# Altium PCB usbasp.PcbDoc (part 2 of 3)
Units mm, origin at the board's own origin, x right, y up, seen from the top; angles counter-clockwise.
Board outline 86.49 x 53.59 mm, 2 copper layers (Top Layer, Bottom Layer); 22 components, 22 nets, 89 pads, 22 vias.
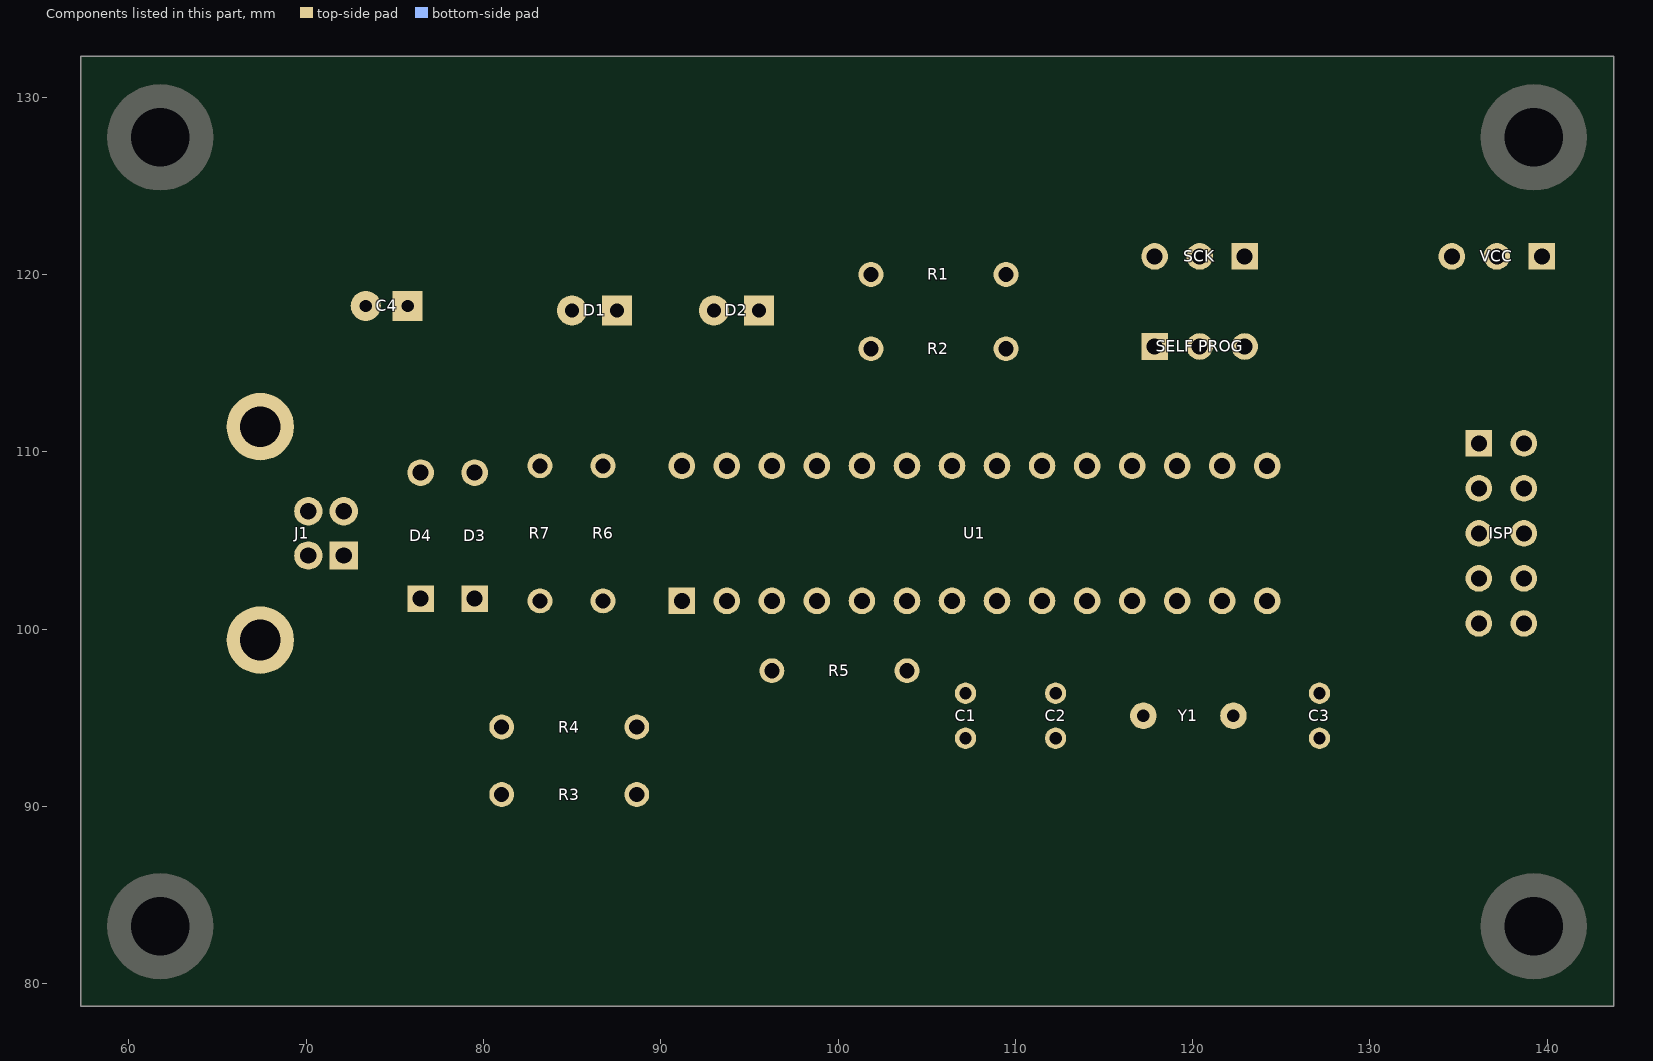
[diagram p2: the components of this part, seen from the top]

## Via types
v1: diameter 1.5, hole 0.711, Top Layer to Bottom Layer, tented top, 17 vias
v2: diameter 1.5, hole 0.711, Top Layer to Bottom Layer, 5 vias

## Nets (pads, with @x,y where several pads share a name; then routed paths per layer and width w, separated by ;. In a path a pad name is that pad's centre, name@x,y a point inside that pad or via, vN(x,y) a via of type N, cw(c..) or ccw(c..) an arc to the next point about the centre after c; other vN are vias at no path point) (continued)
copper on no net: (continued)
  Bottom Layer w0.01: 126.203,122.141 129.468,122.141 ; 126.203,122.193 129.457,122.193 ; 126.203,122.234 129.468,122.234 ; 126.203,122.275 129.457,122.275 ; 126.203,122.306 127.727,122.306 ; 126.203,122.357 127.727,122.357 ; 126.203,122.388 127.727,122.388 ; 126.203,122.429 127.727,122.429 ; 126.203,122.471 127.727,122.471 ; 126.203,122.512 127.727,122.512 ; 126.203,122.553 127.727,122.553 ; 126.203,122.604 127.727,122.604 ; 126.203,122.635 127.727,122.635 ; 126.203,122.687 127.727,122.687 ; 126.203,122.728 127.738,122.728 ; 126.203,122.759 129.457,122.759 ; 126.203,122.8 129.457,122.8 ; 126.203,122.852 129.457,122.852 ; 126.203,122.872 129.457,122.872 ; 126.203,122.924 129.468,122.924 ; 126.203,122.965 129.457,122.965 ; 126.203,123.006 129.457,123.006 ; 126.203,123.058 129.468,123.058 ; 126.203,123.099 129.468,123.099 ; 126.203,123.119 129.457,123.119 ; 126.203,123.181 129.468,123.181 ; 126.203,123.222 129.457,123.222 ; 126.203,123.263 129.468,123.263 ; 126.203,123.294 129.457,123.294 ; 126.203,123.346 129.457,123.346 ; 126.203,123.377 129.457,123.377 ; 126.203,123.428 129.468,123.428 ; 126.203,123.459 129.457,123.459 ; 126.203,123.511 129.457,123.511 ; 126.203,123.542 129.457,123.542 ; 126.203,123.583 129.457,123.583 ; 126.203,123.634 129.457,123.634 ; 126.203,123.665 129.457,123.665 ; 126.203,123.717 129.468,123.717 ; 126.203,123.758 129.457,123.758 ; 126.203,123.789 129.457,123.789 ; 126.203,123.84 129.468,123.84 ; 126.203,123.881 129.457,123.881 ; 126.203,123.912 129.457,123.912 ; 126.203,123.953 129.457,123.953 ; 126.203,124.005 129.457,124.005 ; 126.203,124.036 129.457,124.036 ; 126.203,124.077 129.457,124.077 ; 126.203,124.128 129.457,124.128 ; 126.203,124.159 128.16,124.159 ; 126.203,124.201 128.057,124.201 ; 126.203,124.252 127.985,124.252 ; 126.203,124.293 127.933,124.293 ; 126.203,124.334 127.902,124.334 ; 126.203,124.365 127.882,124.365 ; 126.203,124.417 127.861,124.417 ; 126.203,124.448 127.851,124.448 ; 126.203,124.489 127.83,124.489 ; 126.203,124.54 127.82,124.54 ; 126.203,124.582 127.82,124.582 ; 126.203,124.623 127.81,124.623 ; 126.203,124.654 127.82,124.654 ; 126.203,124.695 127.82,124.695 ; 126.203,124.746 127.82,124.746 ; 126.203,124.777 127.83,124.777 ; 126.203,124.818 127.841,124.818 ; 126.203,124.87 127.861,124.87 ; 126.203,124.901 127.872,124.901 ; 126.203,124.942 127.892,124.942 ; 126.203,124.983 127.923,124.983 ; 126.203,125.035 127.964,125.035 ; 126.203,125.076 128.016,125.076 ; 126.203,125.107 128.057,125.107 ; 126.203,125.148 128.139,125.148 ; 126.203,125.189 129.457,125.189 ; 126.203,125.23 129.457,125.23 ; 126.203,125.272 129.457,125.272 ; 126.203,125.313 129.457,125.313 ; 126.203,125.344 129.468,125.344 ; 126.203,125.395 129.457,125.395 ; 126.203,125.436 129.457,125.436 ; 126.203,125.477 129.457,125.477 ; 126.203,125.529 129.468,125.529 ; 126.203,125.57 129.457,125.57 ; 126.203,125.611 129.457,125.611 ; 126.203,125.653 129.457,125.653 ; 126.203,125.683 129.457,125.683 ; 126.203,125.725 130.106,125.725 ; 126.203,125.766 130.055,125.766 ; 126.203,125.807 130.003,125.807 ; 126.203,125.838 129.962,125.838 ; 126.203,125.9 129.89,125.9 ; 126.203,125.941 129.838,125.941 ; 126.203,125.972 129.807,125.972 ; 126.203,126.013 129.756,126.013 ; 126.203,126.064 129.725,126.064 ; 126.203,126.085 129.694,126.085 ; 126.203,126.137 129.653,126.137 ; 126.203,126.178 129.622,126.178 ; 126.203,126.209 129.602,126.209 ; 126.203,126.26 129.571,126.26 ; 126.203,126.301 129.56,126.301 ; 126.203,126.353 129.54,126.353 ; 126.203,126.384 129.529,126.384 ; 126.203,126.425 129.519,126.425 ; 126.203,126.466 129.519,126.466 ; 126.203,126.497 129.519,126.497 ; 126.203,126.548 129.519,126.548 ; 126.203,126.59 129.519,126.59 ; 126.203,126.631 129.519,126.631 ; 126.203,126.672 129.519,126.672 ; 126.203,126.713 129.529,126.713 ; 126.203,126.744 132.856,126.744 ; 126.214,120.236 129.097,120.236 ; 126.214,120.246 129.148,120.246 ; 126.214,120.257 129.179,120.257 ; 126.214,120.267 129.19,120.267 ; 126.214,120.277 129.21,120.277 ; 126.214,120.287 129.221,120.287 ; 126.214,120.298 129.241,120.298 ; 126.214,120.308 129.251,120.308 ; 126.214,120.318 129.262,120.318 ; 126.214,120.329 129.272,120.329 ; 126.214,120.339 129.293,120.339 ; 126.214,120.349 129.303,120.349 ; 126.214,120.36 129.313,120.36 ; 126.214,120.37 129.323,120.37 ; 126.214,120.38 129.334,120.38 ; 126.214,120.39 129.344,120.39 ; 126.214,120.401 129.354,120.401 ; 126.214,120.411 129.365,120.411 ; 126.214,120.421 129.385,120.421 ; 126.214,120.432 129.396,120.432 ; 126.214,120.442 129.406,120.442 ; 126.214,120.452 129.416,120.452 ; 126.214,120.462 129.426,120.462 ; 126.214,120.473 129.437,120.473 ; 126.214,120.483 129.437,120.483 ; 126.214,120.493 129.447,120.493 ; 126.214,120.504 129.447,120.504 ; 126.214,120.514 129.457,120.514 ; 126.214,120.524 129.457,120.524 ; 126.214,120.535 129.457,120.535 ; 126.214,120.545 129.468,120.545 ; 126.214,120.555 129.457,120.555 ; 126.214,120.565 129.457,120.565 ; 126.214,120.576 129.468,120.576 ; 126.214,120.586 129.457,120.586 ; 126.214,120.596 129.468,120.596 ; 126.214,120.607 129.468,120.607 ; 126.214,120.617 129.457,120.617 ; 126.214,120.627 129.468,120.627 ; 126.214,120.638 129.457,120.638 ; 126.214,120.648 129.457,120.648 ; 126.214,120.658 129.468,120.658 ; 126.214,120.668 129.457,120.668 ; 126.214,120.679 129.468,120.679 ; 126.214,120.689 129.457,120.689 ; 126.214,120.699 129.468,120.699 ; 126.214,120.71 129.457,120.71 ; 126.214,120.72 129.468,120.72 ; 126.214,120.73 129.468,120.73 ; 126.214,120.741 129.457,120.741 ; 126.214,120.751 129.468,120.751 ; 126.214,120.761 129.457,120.761 ; 126.214,120.771 129.468,120.771 ; 126.214,120.782 129.457,120.782 ; 126.214,120.792 129.468,120.792 ; 126.214,120.802 129.457,120.802 ; 126.214,120.813 129.457,120.813 ; 126.214,120.823 129.468,120.823 ; 126.214,120.833 129.468,120.833 ; 126.214,120.844 129.457,120.844 ; 126.214,120.854 129.457,120.854 ; 126.214,120.864 129.468,120.864 ; 126.214,120.874 129.457,120.874 ; 126.214,120.885 129.468,120.885 ; 126.214,120.895 129.457,120.895 ; 126.214,120.905 129.468,120.905 ; 126.214,120.916 129.457,120.916 ; 126.214,120.926 129.468,120.926 ; 126.214,120.936 129.457,120.936 ; 126.214,120.946 129.468,120.946 ; 126.214,120.957 129.457,120.957 ; 126.214,120.967 129.457,120.967 ; 126.214,120.977 129.468,120.977 ; 126.214,120.988 129.457,120.988 ; 126.214,120.998 129.468,120.998 ; 126.214,121.008 129.457,121.008 ; 126.214,121.019 129.468,121.019 ; 126.214,121.029 129.457,121.029 ; 126.214,121.039 129.468,121.039 ; 126.214,121.049 129.457,121.049 ; 126.214,121.06 129.468,121.06 ; 126.214,121.07 129.457,121.07 ; 126.214,121.08 129.468,121.08 ; 126.214,121.091 129.457,121.091 ; 126.214,121.101 129.457,121.101 ; 126.214,121.111 129.468,121.111 ; 126.214,121.122 129.457,121.122 ; 126.214,121.132 129.468,121.132 ; 126.214,121.142 129.468,121.142 ; 126.214,121.152 129.457,121.152 ; 126.214,121.163 129.468,121.163 ; 126.214,121.173 129.468,121.173 ; 126.214,121.183 129.468,121.183 ; 126.214,121.194 129.457,121.194 ; 126.214,121.204 129.468,121.204 ; 126.214,121.214 129.468,121.214 ; 126.214,121.225 129.457,121.225 ; 126.214,121.235 129.468,121.235 ; 126.214,121.245 129.468,121.245 ; 126.214,121.255 129.468,121.255 ; 126.214,121.266 129.457,121.266 ; 126.214,121.276 129.468,121.276 ; 126.214,121.286 129.468,121.286 ; 126.214,121.297 129.457,121.297 ; 126.214,121.307 129.468,121.307 ; 126.214,121.317 129.468,121.317 ; 126.214,121.327 129.468,121.327 ; 126.214,121.338 129.468,121.338 ; 126.214,121.348 129.468,121.348 ; 126.214,121.358 129.468,121.358 ; 126.214,121.369 129.468,121.369 ; 126.214,121.379 129.468,121.379 ; 126.214,121.389 129.468,121.389 ; 126.214,121.4 129.468,121.4 ; 126.214,121.41 129.468,121.41 ; 126.214,121.42 129.468,121.42 ; 126.214,121.43 129.468,121.43 ; 126.214,121.441 129.468,121.441 ; 126.214,121.451 129.468,121.451 ; 126.214,121.461 129.468,121.461 ; 126.214,121.472 129.468,121.472 ; 126.214,121.482 129.468,121.482 ; 126.214,121.492 129.468,121.492 ; 126.214,121.503 129.468,121.503 ; 126.214,121.513 129.478,121.513 ; 126.214,121.523 129.468,121.523 ; 126.214,121.533 129.468,121.533 ; 126.214,121.544 129.468,121.544 ; 126.214,121.554 129.478,121.554 ; 126.214,121.564 129.468,121.564 ; 126.214,121.575 129.468,121.575 ; 126.214,121.585 129.468,121.585 ; 126.214,121.595 129.468,121.595 ; 126.214,121.606 129.468,121.606 ; 126.214,121.616 129.468,121.616 ; 126.214,121.626 129.468,121.626 ; 126.214,121.636 129.468,121.636 ; 126.214,121.647 129.478,121.647 ; 126.214,121.657 129.468,121.657 ; 126.214,121.667 129.468,121.667 ; 126.214,121.678 129.468,121.678 ; 126.214,121.688 129.468,121.688 ; 126.214,121.698 129.478,121.698 ; 126.214,121.709 129.468,121.709 ; 126.214,121.719 129.478,121.719 ; 126.214,121.729 129.468,121.729 ; 126.214,121.739 129.478,121.739 ; 126.214,121.75 129.468,121.75 ; 126.214,121.76 129.468,121.76 ; 126.214,121.77 129.468,121.77 ; 126.214,121.781 129.478,121.781 ; 126.214,121.791 129.468,121.791 ; 126.214,121.801 129.478,121.801 ; 126.214,121.811 129.468,121.811 ; 126.214,121.822 129.478,121.822 ; 126.214,121.832 129.468,121.832 ; 126.214,121.842 129.468,121.842 ; 126.214,121.853 129.478,121.853 ; 126.214,121.863 129.468,121.863 ; 126.214,121.873 129.478,121.873 ; 126.214,121.884 129.468,121.884 ; 126.214,121.894 129.478,121.894 ; 126.214,121.904 129.468,121.904 ; 126.214,121.914 129.468,121.914 ; 126.214,121.925 129.478,121.925 ; 126.214,121.935 129.468,121.935 ; 126.214,121.945 129.478,121.945 ; 126.214,121.956 129.468,121.956 ; 126.214,121.966 129.468,121.966 ; 126.214,121.976 129.478,121.976 ; 126.214,121.987 129.468,121.987 ; 126.214,121.997 129.468,121.997 ; 126.214,122.007 129.468,122.007 ; 126.214,122.017 129.468,122.017 ; 126.214,122.028 129.468,122.028 ; 126.214,122.038 129.468,122.038 ; 126.214,122.048 129.468,122.048 ; 126.214,122.059 129.468,122.059 ; 126.214,122.069 129.468,122.069 ; 126.214,122.079 129.468,122.079 ; 126.214,122.09 129.468,122.09 ; 126.214,122.1 129.468,122.1 ; 126.214,122.11 129.468,122.11 ; 126.214,122.12 129.468,122.12 ; 126.214,122.131 129.468,122.131 ; 126.214,122.151 129.468,122.151 ; 126.214,122.162 129.468,122.162 ; 126.214,122.172 129.468,122.172 ; 126.214,122.182 129.468,122.182 ; 126.214,122.203 129.468,122.203 ; 126.214,122.213 129.457,122.213 ; 126.214,122.223 129.468,122.223 ; 126.214,122.244 129.457,122.244 ; 126.214,122.254 129.457,122.254 ; 126.214,122.265 129.468,122.265 ; 126.214,122.285 127.727,122.285 ; 126.214,122.295 127.727,122.295 ; 126.214,122.316 127.727,122.316 ; 126.214,122.326 127.727,122.326 ; 126.214,122.337 127.727,122.337 ; 126.214,122.347 127.727,122.347 ; 126.214,122.368 127.727,122.368 ; 126.214,122.378 127.727,122.378 ; 126.214,122.398 127.727,122.398 ; 126.214,122.409 127.727,122.409 ; 126.214,122.419 127.727,122.419 ; 126.214,122.44 127.727,122.44 ; 126.214,122.45 127.727,122.45 ; 126.214,122.46 127.727,122.46 ; 126.214,122.481 127.727,122.481 ; 126.214,122.491 127.727,122.491 ; 126.214,122.501 127.727,122.501 ; 126.214,122.522 127.727,122.522 ; 126.214,122.532 127.727,122.532 ; 126.214,122.543 127.727,122.543 ; 126.214,122.563 127.727,122.563 ; 126.214,122.574 127.727,122.574 ; 126.214,122.584 127.727,122.584 ; 126.214,122.594 127.727,122.594 ; 126.214,122.615 127.727,122.615 ; 126.214,122.625 127.727,122.625 ; 126.214,122.646 127.727,122.646 ; 126.214,122.656 127.727,122.656 ; 126.214,122.666 127.727,122.666 ; 126.214,122.676 127.727,122.676 ; 126.214,122.697 127.727,122.697 ; 126.214,122.707 127.727,122.707 ; 126.214,122.718 127.727,122.718 ; 126.214,122.738 129.468,122.738 ; 126.214,122.749 129.457,122.749 ; 126.214,122.769 129.468,122.769 ; 126.214,122.779 129.457,122.779 ; 126.214,122.79 129.457,122.79 ; 126.214,122.81 129.468,122.81 ; 126.214,122.821 129.457,122.821 ; 126.214,122.831 129.468,122.831 ; 126.214,122.841 129.457,122.841 ; 126.214,122.862 129.468,122.862 ; 126.214,122.882 129.457,122.882 ; 126.214,122.893 129.468,122.893 ; 126.214,122.903 129.457,122.903 ; 126.214,122.913 129.457,122.913 ; 126.214,122.934 129.457,122.934 ; 126.214,122.944 129.457,122.944 ; 126.214,122.955 129.468,122.955 ; 126.214,122.975 129.457,122.975 ; 126.214,122.985 129.468,122.985 ; 126.214,122.996 129.468,122.996 ; 126.214,123.016 129.457,123.016 ; 126.214,123.027 129.468,123.027 ; 126.214,123.037 129.457,123.037 ; 126.214,123.047 129.457,123.047 ; 126.214,123.068 129.457,123.068 ; 126.214,123.078 129.457,123.078 ; 126.214,123.088 129.457,123.088 ; 126.214,123.109 129.457,123.109 ; 126.214,123.13 129.457,123.13 ; 126.214,123.14 129.468,123.14 ; 126.214,123.15 129.457,123.15 ; 126.214,123.16 129.457,123.16 ; 126.214,123.171 129.457,123.171 ; 126.214,123.191 129.457,123.191 ; 126.214,123.202 129.468,123.202 ; 126.214,123.212 129.457,123.212 ; 126.214,123.233 129.468,123.233 ; 126.214,123.243 129.457,123.243 ; 126.214,123.253 129.457,123.253 ; 126.214,123.274 129.457,123.274 ; 126.214,123.284 129.457,123.284 ; 126.214,123.305 129.468,123.305 ; 126.214,123.315 129.457,123.315 ; 126.214,123.325 129.468,123.325 ; 126.214,123.336 129.457,123.336 ; 126.214,123.356 129.468,123.356 ; 126.214,123.366 129.457,123.366 ; 126.214,123.387 129.468,123.387 ; 126.214,123.397 129.457,123.397 ; 126.214,123.408 129.457,123.408 ; 126.214,123.418 129.457,123.418 ; 126.214,123.439 129.457,123.439 ; 126.214,123.449 129.457,123.449 ; 126.214,123.469 129.468,123.469 ; 126.214,123.48 129.457,123.48 ; 126.214,123.49 129.468,123.49 ; 126.214,123.5 129.457,123.5 ; 126.214,123.521 129.468,123.521 ; 126.214,123.531 129.468,123.531 ; 126.214,123.552 129.457,123.552 ; 126.214,123.562 129.468,123.562 ; 126.214,123.572 129.457,123.572 ; 126.214,123.593 129.468,123.593 ; 126.214,123.603 129.457,123.603 ; 126.214,123.614 129.468,123.614 ; 126.214,123.624 129.457,123.624 ; 126.214,123.644 129.468,123.644 ; 126.214,123.655 129.457,123.655 ; 126.214,123.675 129.468,123.675 ; 126.214,123.686 129.457,123.686 ; 126.214,123.696 129.457,123.696 ; 126.214,123.706 129.457,123.706 ; 126.214,123.727 129.457,123.727 ; 126.214,123.737 129.468,123.737 ; 126.214,123.747 129.457,123.747 ; 126.214,123.768 129.468,123.768 ; 126.214,123.778 129.457,123.778 ; 126.214,123.799 129.468,123.799 ; 126.214,123.809 129.457,123.809 ; 126.214,123.82 129.457,123.82 ; 126.214,123.83 129.457,123.83 ; 126.214,123.85 129.457,123.85 ; 126.214,123.861 129.468,123.861 ; 126.214,123.871 129.457,123.871 ; 126.214,123.892 129.468,123.892 ; 126.214,123.902 129.457,123.902 ; 126.214,123.923 129.468,123.923 ; 126.214,123.933 129.457,123.933 ; 126.214,123.943 129.468,123.943 ; 126.214,123.964 129.457,123.964 ; 126.214,123.974 129.468,123.974 ; 126.214,123.984 129.468,123.984 ; 126.214,123.995 129.457,123.995 ; 126.214,124.015 129.457,124.015 ; 126.214,124.025 129.468,124.025 ; 126.214,124.046 129.468,124.046 ; 126.214,124.056 129.457,124.056 ; 126.214,124.067 129.457,124.067 ; 126.214,124.087 129.468,124.087 ; 126.214,124.098 129.457,124.098 ; 126.214,124.108 129.457,124.108 ; 126.214,124.118 129.468,124.118 ; 126.214,124.139 128.263,124.139 ; 126.214,124.149 128.201,124.149 ; 126.214,124.17 128.129,124.17 ; 126.214,124.18 128.098,124.18 ; 126.214,124.19 128.077,124.19 ; 126.214,124.211 128.036,124.211 ; 126.214,124.221 128.026,124.221 ; 126.214,124.231 128.005,124.231 ; 126.214,124.242 127.995,124.242 ; 126.214,124.262 127.964,124.262 ; 126.214,124.273 127.964,124.273 ; 126.214,124.283 127.944,124.283 ; 126.214,124.304 127.933,124.304 ; 126.214,124.314 127.923,124.314 ; 126.214,124.324 127.913,124.324 ; 126.214,124.345 127.902,124.345 ; 126.214,124.355 127.892,124.355 ; 126.214,124.376 127.882,124.376 ; 126.214,124.386 127.872,124.386 ; 126.214,124.396 127.872,124.396 ; 126.214,124.407 127.861,124.407 ; 126.214,124.427 127.851,124.427 ; 126.214,124.437 127.851,124.437 ; 126.214,124.458 127.841,124.458 ; 126.214,124.468 127.841,124.468 ; 126.214,124.479 127.841,124.479 ; 126.214,124.499 127.83,124.499 ; 126.214,124.509 127.83,124.509 ; 126.214,124.52 127.83,124.52 ; 126.214,124.53 127.82,124.53 ; 126.214,124.551 127.82,124.551 ; 126.214,124.561 127.82,124.561 ; 126.214,124.571 127.82,124.571 ; 126.214,124.592 127.82,124.592 ; 126.214,124.602 127.81,124.602 ; 126.214,124.612 127.82,124.612 ; 126.214,124.633 127.82,124.633 ; 126.214,124.643 127.82,124.643 ; 126.214,124.664 127.81,124.664 ; 126.214,124.674 127.82,124.674 ; 126.214,124.685 127.82,124.685 ; 126.214,124.705 127.82,124.705 ; 126.214,124.715 127.82,124.715 ; 126.214,124.726 127.82,124.726 ; 126.214,124.736 127.82,124.736 ; 126.214,124.757 127.83,124.757 ; 126.214,124.767 127.83,124.767 ; 126.214,124.788 127.83,124.788 ; 126.214,124.798 127.841,124.798 ; 126.214,124.808 127.841,124.808 ; 126.214,124.829 127.851,124.829 ; 126.214,124.839 127.851,124.839 ; 126.214,124.849 127.851,124.849 ; 126.214,124.86 127.851,124.86 ; 126.214,124.88 127.872,124.88 ; 126.214,124.89 127.872,124.89 ; 126.214,124.911 127.882,124.911 ; 126.214,124.921 127.882,124.921 ; 126.214,124.932 127.892,124.932 ; 126.214,124.952 127.902,124.952 ; 126.214,124.963 127.913,124.963 ; 126.214,124.973 127.913,124.973 ; 126.214,124.993 127.933,124.993 ; 126.214,125.004 127.944,125.004 ; 126.214,125.014 127.954,125.014 ; 126.214,125.024 127.954,125.024 ; 126.214,125.045 127.974,125.045 ; 126.214,125.055 127.985,125.055 ; 126.214,125.066 127.995,125.066 ; 126.214,125.086 128.026,125.086 ; 126.214,125.096 128.036,125.096 ; 126.214,125.117 128.077,125.117 ; 126.214,125.127 128.088,125.127 ; 126.214,125.138 128.108,125.138 ; 126.214,125.158 128.16,125.158 ; 126.214,125.169 128.211,125.169 ; 126.214,125.179 129.457,125.179 ; 126.214,125.199 129.468,125.199 ; 126.214,125.21 129.457,125.21 ; 126.214,125.22 129.468,125.22 ; 126.214,125.241 129.457,125.241 ; 126.214,125.251 129.468,125.251 ; 126.214,125.261 129.457,125.261 ; 126.214,125.282 129.468,125.282 ; 126.214,125.292 129.457,125.292 ; 126.214,125.302 129.457,125.302 ; 126.214,125.323 129.468,125.323 ; 126.214,125.333 129.457,125.333 ; 126.214,125.354 129.457,125.354 ; 126.214,125.364 129.457,125.364 ; 126.214,125.374 129.468,125.374 ; 126.214,125.385 129.457,125.385 ; 126.214,125.405 129.468,125.405 ; 126.214,125.416 129.457,125.416 ; 126.214,125.426 129.457,125.426 ; 126.214,125.447 129.468,125.447 ; 126.214,125.457 129.457,125.457 ; 126.214,125.467 129.457,125.467 ; 126.214,125.488 129.468,125.488 ; 126.214,125.498 129.457,125.498 ; 126.214,125.508 129.457,125.508 ; 126.214,125.519 129.457,125.519 ; 126.214,125.539 129.457,125.539 ; 126.214,125.55 129.468,125.55 ; 126.214,125.56 129.457,125.56 ; 126.214,125.58 129.468,125.58 ; 126.214,125.591 129.457,125.591 ; 126.214,125.601 129.468,125.601 ; 126.214,125.622 129.457,125.622 ; 126.214,125.632 129.457,125.632 ; 126.214,125.642 129.468,125.642 ; 126.214,125.663 129.457,125.663 ; 126.214,125.673 129.468,125.673 ; 126.214,125.694 129.457,125.694 ; 126.214,125.704 129.468,125.704 ; 126.214,125.714 130.116,125.714 ; 126.214,125.735 130.086,125.735 ; 126.214,125.745 130.075,125.745 ; 126.214,125.756 130.055,125.756 ; 126.214,125.776 130.034,125.776 ; 126.214,125.786 130.024,125.786 ; 126.214,125.797 130.003,125.797 ; 126.214,125.817 129.983,125.817 ; 126.214,125.828 129.972,125.828 ; 126.214,125.848 129.952,125.848 ; 126.214,125.858 129.941,125.858 ; 126.214,125.869 129.921,125.869 ; 126.214,125.879 129.91,125.879 ; 126.214,125.889 129.9,125.889 ; 126.214,125.91 129.88,125.91 ; 126.214,125.92 129.859,125.92 ; 126.214,125.931 129.859,125.931 ; 126.214,125.951 129.828,125.951 ; 126.214,125.961 129.818,125.961 ; 126.214,125.982 129.787,125.982 ; 126.214,125.992 129.787,125.992 ; 126.214,126.003 129.766,126.003 ; 126.214,126.023 129.756,126.023 ; 126.214,126.034 129.735,126.034 ; 126.214,126.044 129.735,126.044 ; 126.214,126.054 129.725,126.054 ; 126.214,126.075 129.705,126.075 ; 126.214,126.095 129.694,126.095 ; 126.214,126.106 129.684,126.106 ; 126.214,126.116 129.674,126.116 ; 126.214,126.126 129.663,126.126 ; 126.214,126.147 129.653,126.147 ; 126.214,126.157 129.643,126.157 ; 126.214,126.167 129.643,126.167 ; 126.214,126.188 129.622,126.188 ; 126.214,126.198 129.612,126.198 ; 126.214,126.219 129.602,126.219 ; 126.214,126.229 129.591,126.229 ; 126.214,126.239 129.581,126.239 ; 126.214,126.25 129.581,126.25 ; 126.214,126.27 129.571,126.27 ; 126.214,126.281 129.56,126.281 ; 126.214,126.291 129.56,126.291 ; 126.214,126.312 129.55,126.312 ; 126.214,126.322 129.55,126.322 ; 126.214,126.332 129.54,126.332 ; 126.214,126.342 129.54,126.342 ; 126.214,126.363 129.54,126.363 ; 126.214,126.373 129.54,126.373 ; 126.214,126.394 129.529,126.394 ; 126.214,126.404 129.529,126.404 ; 126.214,126.415 129.529,126.415 ; 126.214,126.435 129.529,126.435 ; 126.214,126.445 129.519,126.445 ; 126.214,126.456 129.529,126.456 ; 126.214,126.476 129.519,126.476 ; 126.214,126.487 129.519,126.487 ; 126.214,126.507 129.519,126.507 ; 126.214,126.518 129.519,126.518 ; 126.214,126.528 129.519,126.528 ; 126.214,126.538 129.509,126.538 ; 126.214,126.559 129.519,126.559 ; 126.214,126.569 129.519,126.569 ; 126.214,126.579 129.519,126.579 ; 126.214,126.6 129.519,126.6 ; 126.214,126.61 129.519,126.61 ; 126.214,126.621 129.519,126.621 ; 126.214,126.641 129.519,126.641 ; 126.214,126.651 129.519,126.651 ; 126.214,126.662 129.519,126.662 ; 126.214,126.682 129.519,126.682 ; 126.214,126.693 129.519,126.693 ; 126.214,126.703 129.519,126.703 ; 126.214,126.723 129.519,126.723 ; 126.214,126.734 129.519,126.734 ; 126.214,126.754 132.856,126.754 ; 126.214,126.765 132.856,126.765 ; 126.214,126.775 132.845,126.775 ; 126.214,126.785 132.856,126.785 ; 126.214,126.796 132.856,126.796 ; 126.214,126.806 126.265,126.806 ; 126.275,126.806 127.985,126.806 ; 126.306,120.226 126.317,120.226 ; 126.347,120.226 126.358,120.226 ; 126.378,120.226 126.389,120.226 ; 126.399,120.226 126.409,120.226 ; 126.42,120.226 126.43,120.226 ; 126.44,120.226 126.45,120.226 ; 126.461,120.226 126.471,120.226 ; 126.481,120.226 126.492,120.226 ; 126.502,120.226 126.512,120.226 ; 126.523,120.226 126.739,120.226 ; 126.636,126.816 126.646,126.816 ; 126.749,120.226 128.479,120.226 ; 126.79,126.816 126.801,126.816 ; 126.862,126.816 126.873,126.816 ; 127.748,122.728 127.758,122.728 ; 127.769,122.728 127.779,122.728 ; 127.789,122.728 127.799,122.728 ; 127.81,122.728 127.82,122.728 ; 127.83,122.728 127.841,122.728 ; 127.851,122.728 127.861,122.728 ; 127.872,122.728 127.882,122.728 ; 127.892,122.728 127.902,122.728 ; 127.913,122.728 127.923,122.728 ; 127.933,122.728 127.944,122.728 ; 127.954,122.728 127.964,122.728 ; 127.974,122.728 127.985,122.728 ; 127.995,122.728 128.005,122.728 ; 127.995,126.806 128.098,126.806 ; 128.016,122.728 128.026,122.728 ; 128.036,122.728 128.047,122.728 ; 128.057,122.728 128.067,122.728 ; 128.077,122.728 128.088,122.728 ; 128.098,122.728 128.108,122.728 ; 128.108,126.806 128.18,126.806 ; 128.119,122.728 128.129,122.728 ; 128.139,122.728 128.15,122.728 ; 128.16,122.728 128.17,122.728 ; 128.17,125.158 128.18,125.158 ; 128.18,122.728 128.191,122.728 ; 128.191,126.806 128.273,126.806 ; 128.201,122.728 128.211,122.728 ; 128.222,122.728 128.232,122.728 ; 128.222,125.169 128.232,125.169 ; 128.242,122.728 128.253,122.728 ; 128.263,122.728 128.273,122.728 ; 128.283,122.728 128.294,122.728 ; 128.283,124.139 128.294,124.139 ; 128.283,126.806 128.314,126.806 ; 128.304,122.728 128.314,122.728 ; 128.325,122.728 128.335,122.728 ; 128.325,126.806 128.345,126.806 ; 128.345,122.728 128.355,122.728 ; 128.345,125.169 129.468,125.169 ; 128.355,126.806 128.366,126.806 ; 128.366,122.728 128.376,122.728 ; 128.376,124.139 128.386,124.139 ; 128.376,126.806 128.386,126.806 ; 128.386,122.728 128.397,122.728 ; 128.397,124.139 129.468,124.139 ; 128.397,126.806 128.407,126.806 ; 128.407,122.728 128.417,122.728 ; 128.417,125.158 129.457,125.158 ; 128.428,122.728 128.438,122.728 ; 128.448,122.728 128.458,122.728 ; 128.448,124.149 129.457,124.149 ; 128.448,125.148 129.457,125.148 ; 128.469,122.728 128.479,122.728 ; 128.469,126.806 128.479,126.806 ; 128.489,120.226 128.613,120.226 ; 128.489,122.728 128.5,122.728 ; 128.489,124.159 129.457,124.159 ; 128.489,125.138 129.468,125.138 ; 128.51,122.728 128.52,122.728 ; 128.52,124.17 129.457,124.17 ; 128.52,125.127 129.457,125.127 ; 128.531,122.728 128.541,122.728 ; 128.541,124.18 129.468,124.18 ; 128.541,125.117 129.457,125.117 ; 128.551,122.728 128.561,122.728 ; 128.561,124.19 129.457,124.19 ; 128.561,125.107 129.468,125.107 ; 128.572,122.728 128.582,122.728 ; 128.582,124.201 129.457,124.201 ; 128.582,125.096 129.457,125.096 ; 128.592,122.728 128.603,122.728 ; 128.603,124.211 129.468,124.211 ; 128.603,125.086 129.457,125.086 ; 128.613,122.728 128.623,122.728 ; 128.613,124.221 129.457,124.221 ; 128.623,120.226 128.644,120.226 ; 128.623,125.076 129.468,125.076 ; 128.634,122.728 128.644,122.728 ; 128.634,124.231 129.457,124.231 ; 128.634,125.066 129.457,125.066 ; 128.644,124.242 129.457,124.242 ; 128.654,120.226 128.664,120.226 ; 128.654,122.728 128.664,122.728 ; 128.654,124.252 129.468,124.252 ; 128.654,125.055 129.468,125.055 ; 128.664,124.262 129.457,124.262 ; 128.664,125.045 129.457,125.045 ; 128.664,126.806 128.675,126.806 ; 128.675,120.226 128.685,120.226 ; 128.675,122.728 128.685,122.728 ; 128.675,124.273 129.457,124.273 ; 128.675,125.035 129.457,125.035 ; 128.685,124.283 129.457,124.283 ; 128.685,125.024 129.468,125.024 ; 128.685,126.806 130.353,126.806 ; 128.695,120.226 128.706,120.226 ; 128.695,122.728 128.706,122.728 ; 128.695,124.293 129.468,124.293 ; 128.695,125.014 129.457,125.014 ; 128.706,124.304 129.457,124.304 ; 128.706,125.004 129.457,125.004 ; 128.716,120.226 128.726,120.226 ; 128.716,122.728 128.726,122.728 ; 128.716,124.314 129.468,124.314 ; 128.716,124.993 129.457,124.993 ; 128.726,124.324 129.457,124.324 ; 128.726,124.334 129.468,124.334 ; 128.726,124.983 129.468,124.983 ; 128.737,120.226 128.747,120.226 ; 128.737,122.728 128.747,122.728 ; 128.737,124.345 129.457,124.345 ; 128.737,124.973 129.457,124.973 ; 128.747,124.355 129.457,124.355 ; 128.747,124.952 129.457,124.952 ; 128.747,124.963 129.468,124.963 ; 128.747,126.816 128.757,126.816 ; 128.757,120.226 128.767,120.226 ; 128.757,122.728 128.767,122.728 ; 128.757,124.365 129.468,124.365 ; 128.757,124.376 129.457,124.376 ; 128.757,124.942 129.457,124.942 ; 128.767,124.386 129.457,124.386 ; 128.767,124.396 129.468,124.396 ; 128.767,124.921 129.457,124.921 ; 128.767,124.932 129.468,124.932 ; 128.767,126.816 130.281,126.816 ; 128.778,120.226 128.788,120.226 ; 128.778,122.728 128.788,122.728 ; 128.778,124.407 129.457,124.407 ; 128.778,124.901 129.457,124.901 ; 128.778,124.911 129.468,124.911 ; 128.788,124.417 129.468,124.417 ; 128.788,124.427 129.457,124.427 ; 128.788,124.437 129.468,124.437 ; 128.788,124.89 129.457,124.89 ; 128.798,120.226 128.809,120.226 ; 128.798,122.728 128.809,122.728 ; 128.798,124.448 129.457,124.448 ; 128.798,124.458 129.457,124.458 ; 128.798,124.86 129.468,124.86 ; 128.798,124.87 129.457,124.87 ; 128.798,124.88 129.457,124.88 ; 128.809,124.468 129.468,124.468 ; 128.809,124.479 129.457,124.479 ; 128.809,124.489 129.457,124.489 ; 128.809,124.839 129.457,124.839 ; 128.809,124.849 129.457,124.849 ; 128.809,126.826 130.219,126.826 ; 128.819,120.226 128.829,120.226 ; 128.819,122.728 128.829,122.728 ; 128.819,124.499 129.457,124.499 ; 128.819,124.509 129.468,124.509 ; 128.819,124.52 129.457,124.52 ; 128.819,124.53 129.468,124.53 ; 128.819,124.798 129.468,124.798 ; 128.819,124.808 129.457,124.808 ; 128.819,124.818 129.457,124.818 ; 128.819,124.829 129.468,124.829 ; 128.829,124.54 129.457,124.54 ; 128.829,124.551 129.457,124.551 ; 128.829,124.561 129.457,124.561 ; 128.829,124.582 129.457,124.582 ; 128.829,124.736 129.457,124.736 ; 128.829,124.757 129.457,124.757 ; 128.829,124.767 129.468,124.767 ; 128.829,124.777 129.457,124.777 ; 128.829,124.788 129.457,124.788 ; 128.839,122.728 128.85,122.728 ; 128.839,124.571 129.468,124.571 ; 128.839,124.592 129.468,124.592 ; 128.839,124.602 129.457,124.602 ; 128.839,124.612 129.457,124.612 ; 128.839,124.623 129.457,124.623 ; 128.839,124.633 129.468,124.633 ; 128.839,124.643 129.457,124.643 ; 128.839,124.654 129.468,124.654 ; 128.839,124.664 129.457,124.664 ; 128.839,124.674 129.457,124.674 ; 128.839,124.685 129.468,124.685 ; 128.839,124.695 129.457,124.695 ; 128.839,124.705 129.457,124.705 ; 128.839,124.715 129.468,124.715 ; 128.839,124.726 129.457,124.726 ; 128.839,124.746 129.468,124.746 ; 128.86,122.728 128.87,122.728 ; 128.86,126.837 130.188,126.837 ; 128.881,122.728 128.891,122.728 ; 128.891,126.847 130.137,126.847 ; 128.901,122.728 128.912,122.728 ; 128.922,122.728 128.932,122.728 ; 128.922,126.857 130.116,126.857 ; 128.942,122.728 128.953,122.728 ; 128.953,126.868 130.086,126.868 ; 128.973,122.728 128.984,122.728 ; 128.973,126.878 130.065,126.878 ; 128.994,122.728 129.004,122.728 ; 128.994,126.888 130.044,126.888 ; 129.015,122.728 129.025,122.728 ; 129.025,126.899 130.013,126.899 ; 129.035,126.909 130.003,126.909 ; 129.045,122.728 129.056,122.728 ; 129.056,126.919 129.983,126.919 ; 129.076,122.728 129.087,122.728 ; 129.076,126.929 129.962,126.929 ; 129.097,122.728 129.107,122.728 ; 129.097,126.94 129.941,126.94 ; 129.107,126.95 129.931,126.95 ; 129.118,122.728 129.128,122.728 ; 129.128,126.96 129.91,126.96 ; 129.138,122.728 129.148,122.728 ; 129.138,126.971 129.9,126.971 ; 129.159,122.728 129.169,122.728 ; 129.159,126.981 129.88,126.981 ; 129.169,126.991 129.869,126.991 ; 129.179,122.728 129.19,122.728 ; 129.179,127.002 129.859,127.002 ; 129.2,122.728 129.21,122.728 ; 129.2,127.012 129.838,127.012 ; 129.21,127.022 129.828,127.022 ; 129.221,122.728 129.231,122.728 ; 129.221,127.032 129.818,127.032 ; 129.231,127.043 129.807,127.043 ; 129.241,122.728 129.251,122.728 ; 129.241,127.053 129.787,127.053 ; 129.251,127.063 129.787,127.063 ; 129.262,122.728 129.272,122.728 ; 129.262,127.074 129.777,127.074 ; 129.272,127.084 129.766,127.084 ; 129.282,122.728 129.293,122.728 ; 129.282,127.094 129.756,127.094 ; 129.293,127.104 129.746,127.104 ; 129.303,122.728 129.313,122.728 ; 129.303,127.115 129.735,127.115 ; 129.313,127.125 129.725,127.125 ; 129.313,127.135 129.725,127.135 ; 129.323,127.146 129.715,127.146 ; 129.334,122.728 129.344,122.728 ; 129.334,127.156 129.705,127.156 ; 129.334,127.166 129.694,127.166 ; 129.344,127.177 129.694,127.177 ; 129.354,122.728 129.365,122.728 ; 129.354,127.187 129.684,127.187 ; 129.354,127.197 129.684,127.197 ; 129.365,127.207 129.674,127.207 ; 129.365,127.218 129.663,127.218 ; 129.375,122.728 129.385,122.728 ; 129.375,127.228 129.663,127.228 ; 129.385,127.238 129.653,127.238 ; 129.385,127.249 129.653,127.249 ; 129.385,127.259 129.643,127.259 ; 129.396,122.728 129.406,122.728 ; 129.396,127.269 129.643,127.269 ; 129.406,127.28 129.632,127.28 ; 129.406,127.29 129.622,127.29 ; 129.416,127.3 129.622,127.3 ; 129.416,127.31 129.612,127.31 ; 129.426,122.728 129.437,122.728 ; 129.426,127.321 129.612,127.321 ; 129.426,127.331 129.602,127.331 ; 129.437,127.341 129.602,127.341 ; 129.437,127.352 129.591,127.352 ; 129.447,122.728 129.457,122.728 ; 129.447,127.362 129.581,127.362 ; 129.457,127.372 129.581,127.372 ; 129.457,127.383 129.571,127.383 ; 129.457,127.393 129.571,127.393 ; 129.468,127.403 129.56,127.403 ; 129.478,125.704 130.127,125.704 ; 129.478,127.413 129.56,127.413 ; 129.478,127.424 129.55,127.424 ; 129.488,125.683 130.168,125.683 ; 129.488,125.694 130.147,125.694 ; 129.488,127.434 129.54,127.434 ; 129.488,127.444 129.54,127.444 ; 129.499,127.455 129.529,127.455 ; 129.499,127.465 129.529,127.465 ; 129.509,120.802 130.003,120.802 ; 129.509,125.663 130.199,125.663 ; 129.509,125.673 130.178,125.673 ; 129.509,127.475 129.519,127.475 ; 129.519,120.668 132.856,120.668 ; 129.519,120.689 132.856,120.689 ; 129.519,120.699 132.856,120.699 ; 129.519,120.71 130.456,120.71 ; 129.519,120.72 130.302,120.72 ; 129.519,120.73 130.23,120.73 ; 129.519,120.741 130.178,120.741 ; 129.519,120.751 130.137,120.751 ; 129.519,120.761 130.096,120.761 ; 129.519,120.771 130.065,120.771 ; 129.519,120.782 130.044,120.782 ; 129.519,120.792 130.024,120.792 ; 129.519,120.813 129.983,120.813 ; 129.519,120.823 129.962,120.823 ; 129.519,120.833 129.952,120.833 ; 129.519,120.844 129.931,120.844 ; 129.519,120.854 129.921,120.854 ; 129.519,120.864 129.91,120.864 ; 129.519,120.874 129.89,120.874 ; 129.519,120.885 129.89,120.885 ; 129.519,120.895 129.88,120.895 ; 129.519,120.905 129.869,120.905 ; 129.519,120.916 129.859,120.916 ; 129.519,120.926 129.849,120.926 ; 129.519,120.936 129.849,120.936 ; 129.519,120.946 129.838,120.946 ; 129.519,120.957 129.828,120.957 ; 129.519,120.967 129.818,120.967 ; 129.519,120.977 129.818,120.977 ; 129.519,120.998 129.807,120.998 ; 129.519,121.008 129.797,121.008 ; 129.519,121.019 129.797,121.019 ; 129.519,121.029 129.797,121.029 ; 129.519,121.039 129.787,121.039 ; 129.519,121.049 129.787,121.049 ; 129.519,121.06 129.787,121.06 ; 129.519,121.07 129.777,121.07 ; 129.519,121.091 129.777,121.091 ; 129.519,121.101 129.766,121.101 ; 129.519,121.122 129.766,121.122 ; 129.519,121.132 129.766,121.132 ; 129.519,121.142 129.756,121.142 ; 129.519,121.163 129.756,121.163 ; 129.519,121.173 129.756,121.173 ; 129.519,121.194 129.756,121.194 ; 129.519,121.204 129.746,121.204 ; 129.519,121.214 129.756,121.214 ; 129.519,121.225 129.746,121.225 ; 129.519,121.245 129.746,121.245 ; 129.519,121.255 129.746,121.255 ; 129.519,121.266 129.756,121.266 ; 129.519,121.286 129.746,121.286 ; 129.519,121.297 129.746,121.297 ; 129.519,121.307 129.756,121.307 ; 129.519,121.317 129.746,121.317 ; 129.519,121.338 129.746,121.338 ; 129.519,121.348 129.746,121.348 ; 129.519,121.358 129.746,121.358 ; 129.519,121.369 129.756,121.369 ; 129.519,121.389 129.756,121.389 ; 129.519,121.4 129.746,121.4 ; 129.519,121.41 129.756,121.41 ; 129.519,121.42 129.756,121.42 ; 129.519,121.43 129.756,121.43 ; 129.519,121.451 129.766,121.451 ; 129.519,121.461 129.756,121.461 ; 129.519,121.472 129.766,121.472 ; 129.519,121.492 129.766,121.492 ; 129.519,121.503 129.766,121.503 ; 129.519,121.513 129.766,121.513 ; 129.519,121.533 129.777,121.533 ; 129.519,121.544 129.777,121.544 ; 129.519,121.554 129.787,121.554 ; 129.519,121.564 129.787,121.564 ; 129.519,121.575 129.787,121.575 ; 129.519,121.585 129.797,121.585 ; 129.519,121.606 129.797,121.606 ; 129.519,121.616 129.807,121.616 ; 129.519,121.626 129.807,121.626 ; 129.519,121.636 129.818,121.636 ; 129.519,121.657 129.818,121.657 ; 129.519,121.667 129.828,121.667 ; 129.519,121.678 129.828,121.678 ; 129.519,121.688 129.838,121.688 ; 129.519,121.698 129.838,121.698 ; 129.519,121.709 129.849,121.709 ; 129.519,121.719 129.849,121.719 ; 129.519,121.729 129.859,121.729 ; 129.519,121.75 129.869,121.75 ; 129.519,121.76 129.88,121.76 ; 129.519,121.77 129.89,121.77 ; 129.519,121.781 129.89,121.781 ; 129.519,121.791 129.9,121.791 ; 129.519,121.801 129.91,121.801 ; 129.519,121.822 129.921,121.822 ; 129.519,121.832 129.931,121.832 ; 129.519,121.842 129.941,121.842 ; 129.519,121.863 129.962,121.863 ; 129.519,121.873 129.972,121.873 ; 129.519,121.884 129.983,121.884 ; 129.519,121.894 129.993,121.894 ; 129.519,121.914 130.024,121.914 ; 129.519,121.925 130.034,121.925 ; 129.519,121.935 130.055,121.935 ; 129.519,121.945 130.075,121.945 ; 129.519,121.956 130.096,121.956 ; 129.519,121.966 130.116,121.966 ; 129.519,121.976 130.137,121.976 ; 129.519,121.987 130.168,121.987 ; 129.519,121.997 130.199,121.997 ; 129.519,122.007 130.25,122.007 ; 129.519,122.017 131.156,122.017 ; 129.519,122.028 131.146,122.028 ; 129.519,122.048 131.146,122.048 ; 129.519,122.059 131.136,122.059 ; 129.519,122.069 131.126,122.069 ; 129.519,125.653 130.219,125.653 ; 129.529,120.627 132.856,120.627 ; 129.529,120.638 132.856,120.638 ; 129.529,120.648 132.856,120.648 ; 129.529,120.658 132.856,120.658 ; 129.529,120.679 132.856,120.679 ; 129.529,120.988 129.818,120.988 ; 129.529,121.08 129.777,121.08 ; 129.529,121.111 129.766,121.111 ; 129.529,121.152 129.766,121.152 ; 129.529,121.183 129.756,121.183 ; 129.529,121.235 129.756,121.235 ; 129.529,121.276 129.746,121.276 ; 129.529,121.327 129.746,121.327 ; 129.529,121.379 129.746,121.379 ; 129.529,121.441 129.756,121.441 ; 129.529,121.482 129.766,121.482 ; 129.529,121.523 129.777,121.523 ; 129.529,121.595 129.797,121.595 ; 129.529,121.647 129.818,121.647 ; 129.529,121.739 129.869,121.739 ; 129.529,121.811 129.921,121.811 ; 129.529,121.853 129.952,121.853 ; 129.529,121.904 130.013,121.904 ; 129.529,122.038 131.146,122.038 ; 129.529,122.079 131.126,122.079 ; 129.529,122.09 131.126,122.09 ; 129.529,122.1 131.115,122.1 ; 129.529,122.11 131.105,122.11 ; 129.529,125.642 130.23,125.642 ; 129.54,120.586 132.856,120.586 ; 129.54,120.596 132.856,120.596 ; 129.54,120.607 132.856,120.607 ; 129.54,120.617 132.845,120.617 ; 129.54,122.12 131.105,122.12 ; 129.54,122.131 131.095,122.131 ; 129.54,125.622 130.261,125.622 ; 129.54,125.632 130.25,125.632 ; 129.54,126.734 132.845,126.734 ; 129.55,120.565 132.856,120.565 ; 129.55,120.576 132.856,120.576 ; 129.55,122.141 131.084,122.141 ; 129.55,122.151 131.084,122.151 ; 129.55,125.611 130.281,125.611 ; 129.56,120.535 132.856,120.535 ; 129.56,120.545 132.856,120.545 ; 129.56,120.555 132.856,120.555 ; 129.56,122.162 131.074,122.162 ; 129.56,125.601 130.302,125.601 ; 129.56,126.723 132.856,126.723 ; 129.571,120.524 132.845,120.524 ; 129.571,122.172 131.074,122.172 ; 129.571,125.58 130.333,125.58 ; 129.571,125.591 130.312,125.591 ; 129.571,126.713 132.856,126.713 ; 129.581,120.504 132.856,120.504 ; 129.581,120.514 132.856,120.514 ; 129.581,122.182 131.064,122.182 ; 129.581,122.193 131.053,122.193 ; 129.581,126.703 132.845,126.703 ; 129.591,120.493 132.856,120.493 ; 129.591,125.56 130.364,125.56 ; 129.591,125.57 130.353,125.57 ; 129.591,126.693 132.856,126.693 ; 129.602,120.473 132.856,120.473 ; 129.602,120.483 132.856,120.483 ; 129.602,122.203 131.043,122.203 ; 129.602,125.55 130.374,125.55 ; 129.612,120.462 132.856,120.462 ; 129.612,122.213 131.043,122.213 ; 129.612,125.539 130.394,125.539 ; 129.612,126.682 132.856,126.682 ; 129.622,120.452 132.845,120.452 ; 129.622,122.223 131.033,122.223 ; 129.622,122.234 131.023,122.234 ; 129.622,125.529 130.405,125.529 ; 129.622,126.672 132.856,126.672 ; 129.632,120.442 132.856,120.442 ; 129.632,125.519 130.415,125.519 ; 129.632,126.662 132.845,126.662 ; 129.643,120.432 132.856,120.432 ; 129.643,122.244 131.012,122.244 ; 129.643,122.254 131.002,122.254 ; 129.643,126.651 132.856,126.651 ; 129.653,120.421 132.856,120.421 ; 129.653,125.498 130.436,125.498 ; 129.653,125.508 130.436,125.508 ; 129.663,120.411 132.856,120.411 ; 129.663,122.265 131.002,122.265 ; 129.663,126.641 132.856,126.641 ; 129.674,120.401 132.856,120.401 ; 129.674,122.275 130.992,122.275 ; 129.674,125.477 130.477,125.477 ; 129.674,125.488 130.467,125.488 ; 129.674,126.631 132.845,126.631 ; 129.684,120.39 132.856,120.39 ; 129.684,122.285 130.971,122.285 ; 129.684,126.621 132.856,126.621 ; 129.694,122.295 130.971,122.295 ; 129.694,125.457 130.508,125.457 ; 129.694,125.467 130.497,125.467 ; 129.705,120.37 132.856,120.37 ; 129.705,120.38 132.856,120.38 ; 129.705,126.61 132.856,126.61 ; 129.715,122.306 130.961,122.306 ; 129.715,122.316 130.951,122.316 ; 129.715,125.436 130.549,125.436 ; 129.715,125.447 130.528,125.447 ; 129.715,126.6 132.856,126.6 ; 129.725,120.36 132.856,120.36 ; 129.725,122.326 130.93,122.326 ; 129.725,126.59 132.845,126.59 ; 129.735,120.349 132.856,120.349 ; 129.735,125.416 130.58,125.416 ; 129.735,125.426 130.57,125.426 ; 129.746,120.339 132.856,120.339 ; 129.746,122.337 130.92,122.337 ; 129.746,126.579 132.856,126.579 ; 129.756,120.329 132.845,120.329 ; 129.756,122.347 130.909,122.347 ; 129.756,125.405 130.6,125.405 ; 129.766,120.318 132.856,120.318 ; 129.766,122.357 130.899,122.357 ; 129.766,125.385 130.631,125.385 ; 129.766,125.395 130.621,125.395 ; 129.766,126.569 132.856,126.569 ; 129.787,120.308 132.856,120.308 ; 129.787,122.368 130.878,122.368 ; 129.787,125.364 130.662,125.364 ; 129.787,125.374 130.652,125.374 ; 129.787,126.559 132.856,126.559 ; 129.797,120.298 132.856,120.298 ; 129.797,122.378 130.868,122.378 ; 129.797,125.354 130.683,125.354 ; 129.807,120.287 132.856,120.287 ; 129.807,122.388 130.848,122.388 ; 129.807,125.344 130.693,125.344 ; 129.807,126.548 132.845,126.548 ; 129.828,120.277 132.856,120.277 ; 129.828,122.398 130.827,122.398 ; 129.828,125.323 130.724,125.323 ; 129.828,125.333 130.703,125.333 ; 129.828,126.538 132.856,126.538 ; 129.838,122.409 130.806,122.409 ; 129.838,125.313 130.745,125.313 ; 129.838,126.528 132.845,126.528 ; 129.849,120.267 132.856,120.267 ; 129.849,125.302 130.745,125.302 ; 129.859,122.419 130.786,122.419 ; 129.869,125.282 130.786,125.282 ; 129.869,125.292 130.765,125.292 ; 129.869,126.518 132.856,126.518 ; 129.88,120.257 132.856,120.257 ; 129.88,122.429 130.755,122.429 ; 129.89,125.272 130.796,125.272 ; 129.89,126.507 132.856,126.507 ; 129.9,122.44 130.755,122.44 ; 129.9,125.261 130.806,125.261 ; 129.91,122.45 130.714,122.45 ; 129.91,125.251 130.827,125.251 ; 129.921,120.246 132.845,120.246 ; 129.921,125.241 130.837,125.241 ; 129.921,126.497 132.856,126.497 ; 129.931,122.46 130.693,122.46 ; 129.931,125.23 130.858,125.23 ; 129.941,126.487 132.856,126.487 ; 129.952,125.22 130.868,125.22 ; 129.962,122.471 130.662,122.471 ; 129.962,125.21 130.889,125.21 ; 129.972,125.199 130.899,125.199 ; 129.972,126.476 132.845,126.476 ; 129.983,120.236 130.003,120.236 ; 129.983,122.481 130.631,122.481 ; 129.993,125.179 130.93,125.179 ; 129.993,125.189 130.909,125.189 ; 129.993,126.466 132.856,126.466 ; 130.013,120.236 132.856,120.236 ; 130.013,122.491 130.6,122.491 ; 130.013,126.456 132.856,126.456 ; 130.024,125.158 130.951,125.158 ; 130.024,125.169 130.94,125.169 ; 130.044,122.501 130.559,122.501 ; 130.044,125.148 130.971,125.148 ; 130.044,126.445 132.856,126.445 ; 130.055,125.138 130.971,125.138 ; 130.065,126.435 132.845,126.435 ; 130.075,125.127 130.992,125.127 ; 130.086,125.117 130.992,125.117 ; 130.086,126.425 132.856,126.425 ; 130.096,122.512 130.508,122.512 ; 130.106,125.107 131.012,125.107 ; 130.116,125.096 131.023,125.096 ; 130.116,126.415 132.856,126.415 ; 130.127,120.226 130.147,120.226 ; 130.137,125.086 131.033,125.086 ; 130.147,122.522 130.446,122.522 ; 130.147,125.076 131.043,125.076 ; 130.147,126.404 130.158,126.404 ; 130.147,126.847 130.158,126.847 ; 130.158,120.226 130.178,120.226 ; 130.158,125.066 131.053,125.066 ; 130.168,126.404 132.856,126.404 ; 130.178,125.055 131.064,125.055 ; 130.188,120.226 130.199,120.226 ; 130.188,125.045 131.074,125.045 ; 130.188,126.394 132.845,126.394 ; 130.209,120.226 130.487,120.226 ; 130.209,121.997 130.219,121.997 ; 130.209,125.035 131.095,125.035 ; 130.219,125.024 131.095,125.024 ; 130.23,122.532 130.24,122.532 ; 130.24,125.014 131.115,125.014 ; 130.24,126.384 132.856,126.384 ; 130.25,125.004 131.126,125.004 ; 130.261,122.007 130.271,122.007 ; 130.261,122.532 130.271,122.532 ; 130.271,124.983 131.136,124.983 ; 130.271,124.993 131.136,124.993 ; 130.281,122.532 130.312,122.532 ; 130.281,126.373 130.291,126.373 ; 130.291,124.973 131.156,124.973 ; 130.302,126.373 132.856,126.373 ; 130.312,120.72 130.322,120.72 ; 130.312,124.963 131.156,124.963 ; 130.322,122.532 130.333,122.532 ; 130.322,124.952 131.167,124.952 ; 130.343,124.942 131.187,124.942 ; 130.343,126.363 130.353,126.363 ; 130.353,122.532 130.364,122.532 ; 130.353,124.932 131.187,124.932 ; 130.364,121.317 131.64,121.317 ; 130.364,121.327 131.651,121.327 ; 130.364,121.338 130.487,121.338 ; 130.364,121.348 130.467,121.348 ; 130.364,121.358 130.436,121.358 ; 130.364,122.007 130.374,122.007 ; 130.364,126.363 132.856,126.363 ; 130.364,126.806 130.374,126.806 ; 130.374,121.286 131.61,121.286 ; 130.374,121.297 131.62,121.297 ; 130.374,121.307 131.63,121.307 ; 130.374,121.369 130.405,121.369 ; 130.374,124.921 131.187,124.921 ; 130.384,121.266 131.579,121.266 ; 130.384,121.276 131.589,121.276 ; 130.384,121.379 130.394,121.379 ; 130.384,122.007 131.156,122.007 ; 130.384,124.911 131.198,124.911 ; 130.384,126.806 130.394,126.806 ; 130.405,121.245 131.548,121.245 ; 130.405,121.255 131.568,121.255 ; 130.405,124.901 131.208,124.901 ; 130.415,121.225 131.527,121.225 ; 130.415,121.235 131.537,121.235 ; 130.415,124.89 131.208,124.89 ; 130.415,126.806 130.425,126.806 ; 130.425,121.214 131.507,121.214 ; 130.425,121.997 131.156,121.997 ; 130.425,126.353 130.436,126.353 ; 130.436,124.88 131.218,124.88 ; 130.446,121.194 131.476,121.194 ; 130.446,121.204 131.496,121.204 ; 130.456,121.183 131.455,121.183 ; 130.456,122.522 130.467,122.522 ; 130.456,124.87 131.229,124.87 ; 130.456,126.353 131.229,126.353 ; 130.467,120.71 130.497,120.71 ; 130.467,121.987 131.167,121.987 ; 130.467,124.86 131.229,124.86 ; 130.477,121.173 131.445,121.173 ; 130.477,126.806 130.487,126.806 ; 130.487,121.163 131.424,121.163 ; 130.487,121.976 131.167,121.976 ; 130.487,124.849 131.229,124.849 ; 130.497,120.226 130.508,120.226 ; 130.497,121.152 131.393,121.152 ; 130.497,121.338 130.508,121.338 ; 130.497,124.839 131.239,124.839 ; 130.508,120.71 130.518,120.71 ; 130.508,121.142 131.373,121.142 ; 130.508,121.966 131.167,121.966 ; 130.518,120.226 130.528,120.226 ; 130.518,121.132 131.352,121.132 ; 130.518,124.829 131.239,124.829 ; 130.528,120.71 130.559,120.71 ; 130.528,121.956 131.167,121.956 ; 130.528,124.818 131.249,124.818 ; 130.539,120.226 130.559,120.226 ; 130.539,121.122 131.332,121.122 ; 130.539,121.945 131.167,121.945 ; 130.539,124.808 131.249,124.808 ; 130.549,121.111 131.29,121.111 ; 130.559,121.935 131.177,121.935 ; 130.559,124.798 131.249,124.798 ; 130.559,126.806 130.57,126.806 ; 130.57,120.226 130.58,120.226 ; 130.57,120.71 132.856,120.71 ; 130.57,121.101 131.259,121.101 ; 130.57,121.338 131.671,121.338 ; 130.57,121.925 131.177,121.925 ; 130.57,124.788 131.259,124.788 ; 130.59,120.226 130.6,120.226 ; 130.59,121.914 131.177,121.914 ; 130.59,124.767 131.259,124.767 ; 130.59,124.777 131.259,124.777 ; 130.6,121.091 131.229,121.091 ; 130.6,121.348 131.682,121.348 ; 130.6,121.904 131.177,121.904 ; 130.611,120.226 130.621,120.226 ; 130.611,121.894 131.177,121.894 ; 130.611,124.757 131.259,124.757 ; 130.621,121.358 131.682,121.358 ; 130.621,121.873 131.177,121.873 ; 130.621,121.884 131.177,121.884 ; 130.621,124.746 131.259,124.746 ; 130.631,121.08 130.642,121.08 ; 130.631,121.369 131.702,121.369 ; 130.631,123.923 130.662,123.923 ; 130.631,124.736 131.27,124.736 ; 130.631,126.806 130.642,126.806 ; 130.642,121.863 131.177,121.863 ; 130.642,123.933 130.672,123.933 ; 130.652,121.08 131.167,121.08 ; 130.652,121.379 131.713,121.379 ; 130.652,121.842 131.177,121.842 ; 130.652,121.853 131.177,121.853 ; 130.652,123.943 130.693,123.943 ; 130.652,123.953 130.714,123.953 ; 130.652,124.726 131.27,124.726 ; 130.652,126.806 130.662,126.806 ; 130.662,120.226 130.672,120.226 ; 130.662,121.389 131.723,121.389 ; 130.662,121.832 131.177,121.832 ; 130.662,123.964 130.745,123.964 ; 130.662,123.974 130.775,123.974 ; 130.662,124.705 131.27,124.705 ; 130.662,124.715 131.27,124.715 ; 130.672,121.4 131.723,121.4 ; 130.672,121.41 131.743,121.41 ; 130.672,121.822 131.177,121.822 ; 130.672,123.984 130.817,123.984 ; 130.672,124.695 131.27,124.695 ; 130.672,126.806 130.683,126.806 ; 130.683,121.42 131.754,121.42 ; 130.683,121.43 131.764,121.43 ; 130.683,121.791 131.177,121.791 ; 130.683,121.801 131.177,121.801 ; 130.683,121.811 131.177,121.811 ; 130.683,123.995 130.858,123.995 ; 130.683,124.005 131.898,124.005 ; 130.693,121.441 131.774,121.441 ; 130.693,124.015 131.898,124.015 ; 130.693,124.025 131.888,124.025 ; 130.693,124.674 131.27,124.674 ; 130.693,124.685 131.27,124.685 ; 130.693,126.806 130.703,126.806 ; 130.703,120.226 130.714,120.226 ; 130.703,121.07 130.714,121.07 ; 130.703,121.451 131.774,121.451 ; 130.703,121.461 131.785,121.461 ; 130.703,121.76 131.177,121.76 ; 130.703,121.77 131.167,121.77 ; 130.703,121.781 131.177,121.781 ; 130.703,124.036 131.877,124.036 ; 130.703,124.654 131.28,124.654 ; 130.703,124.664 131.27,124.664 ; 130.714,121.472 131.795,121.472 ; 130.714,121.482 131.805,121.482 ; 130.714,121.492 131.805,121.492 ; 130.714,121.729 131.177,121.729 ; 130.714,121.739 131.177,121.739 ; 130.714,121.75 131.167,121.75 ; 130.714,124.046 131.877,124.046 ; 130.714,124.056 131.867,124.056 ; 130.714,124.643 131.27,124.643